# Allegro board Receiver.brd
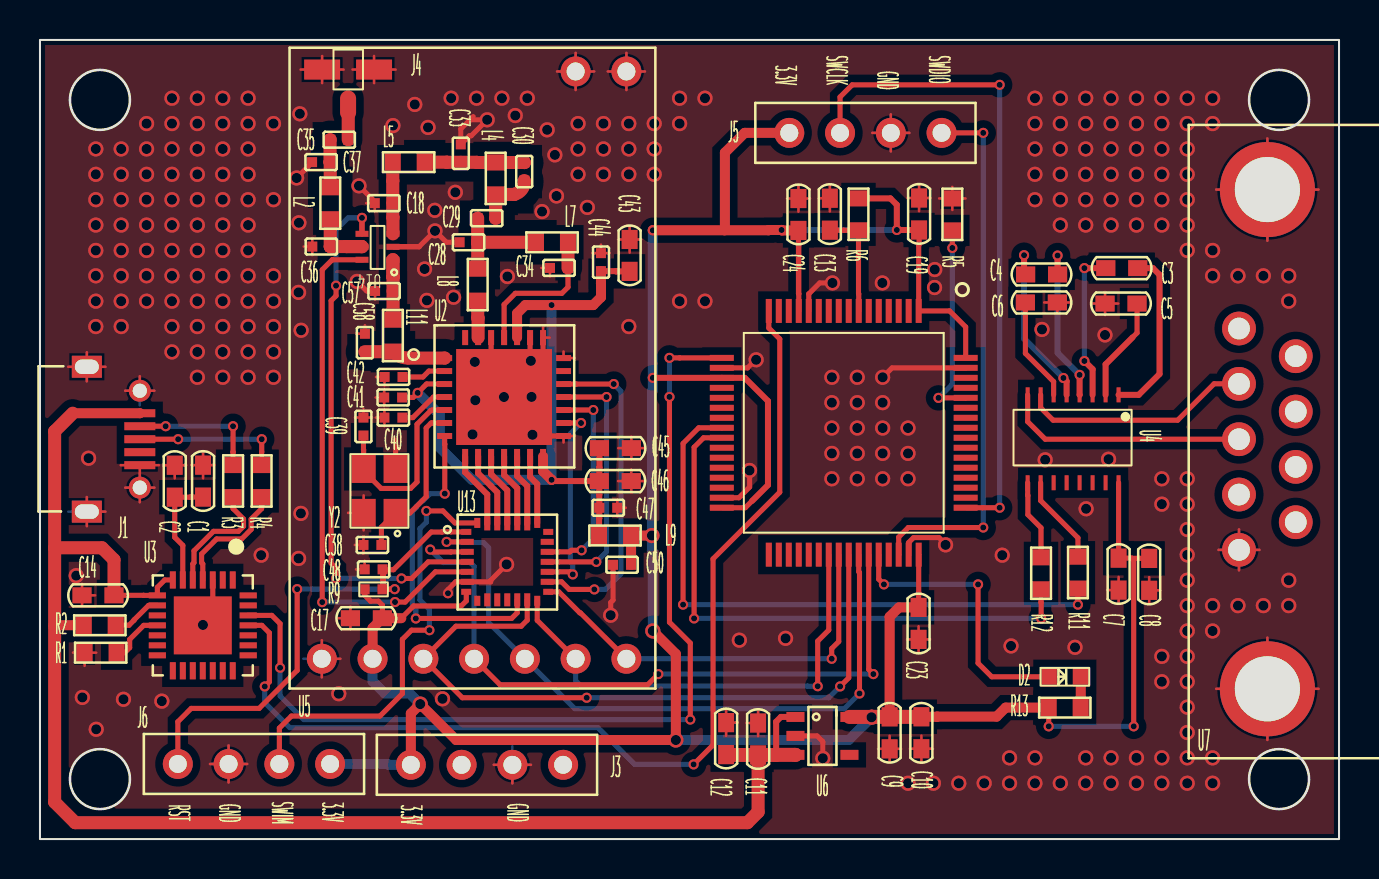
[diagram p0: board, top side]
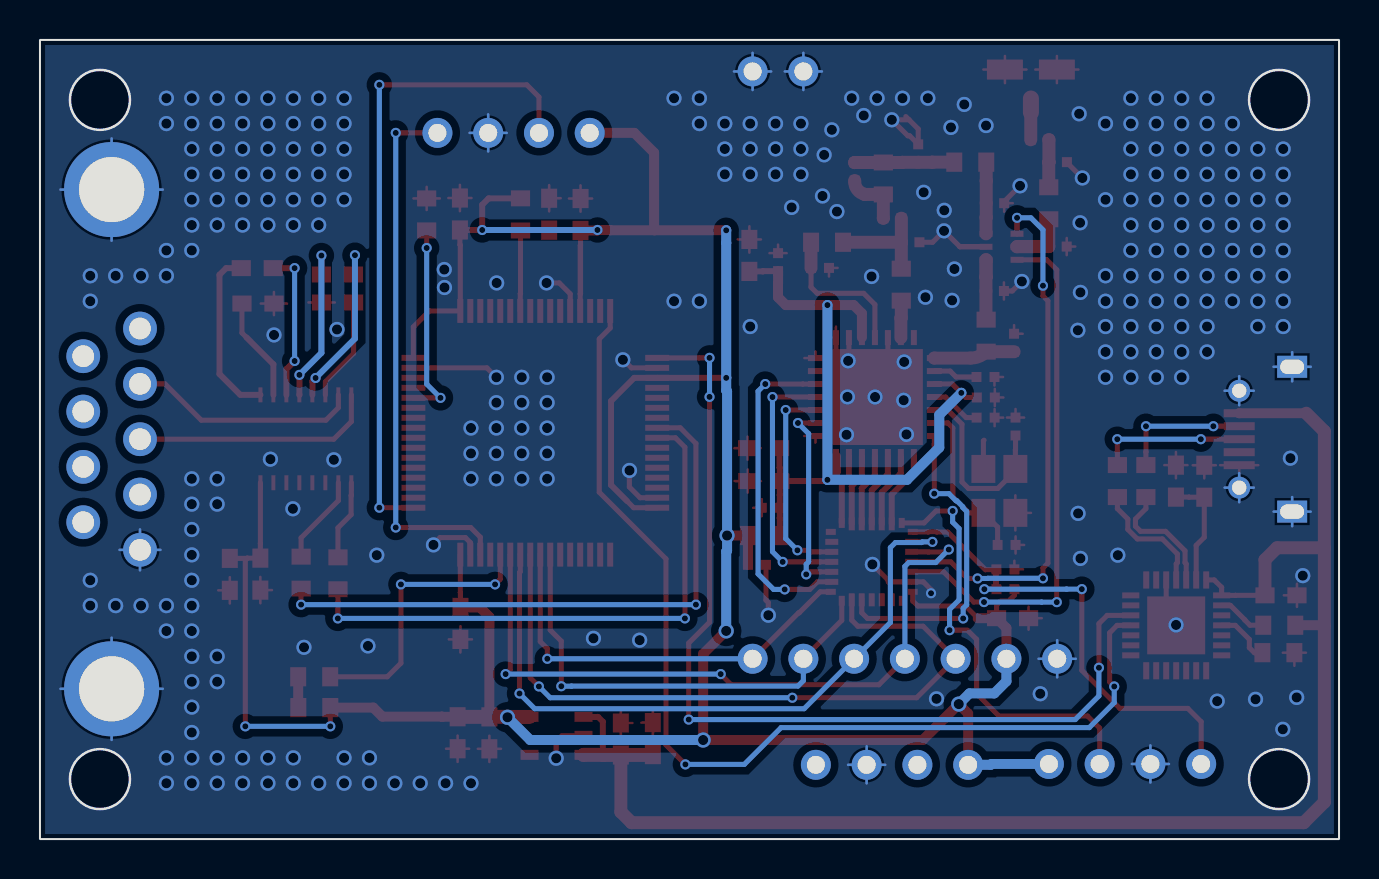
[diagram p1: board, bottom side, seen from below]

Outline 65 x 40 mm; copper layers: TOP, BOTTOM. Coordinates in mm from the lower left corner of the outline.
Outline path: rectangle 0,0 65,40 ; circle c3,37 r1.5 ; circle c3,37 r1.5 ; circle c3,3 r1.5 ; circle c3,3 r1.5 ; circle c62,37 r1.5 ; circle c62,37 r1.5 ; circle c62,3 r1.5 ; circle c62,3 r1.5

## Design rules (mm)
net group D: nets D+ D-
net group RF: nets N78654 N78752 N78904 N78924 N78952

## Placement (name value [footprint] x y rotation side)
C1  4.7uF/10V  [C0603]  8.16 18.72 270 top
C2  0.1uF/10V  [C0603]  6.74 18.71 270 top
C3  0.1uF/10V  [C0603]  53.33 28.58 0 top
C4  0.1uF/10V  [C0603]  49.32 28.26 0 top
C5  0.1uF/10V  [C0603]  53.29 26.81 0 top
C6  0.1uF/10V  [C0603]  50.91 26.86 180 top
C7  10uF/10V  [C0603]  53.97 14.06 270 top
C8  0.1uF/10V  [C0603]  55.5 12.45 90 top
C9  10uF/10V  [C0603]  42.51 6.12 270 top
C10  0.1uF/10V  [C0603]  44.1 4.52 90 top
C11  10uF/10V  [C0603]  35.93 4.21 90 top
C12  0.1uF/10V  [C0603]  34.33 5.83 270 top
C13  0.1uF/10V  [C0603]  39.52 32.08 270 top
C14  10uF/10V  [C0603]  3.7 12.2 180 top
C17  0.1uF/10V  [C0603]  15.53 11.05 0 top
C18  12p  [C0402]  16.75 31.83 0 top
C19  0.1uF/10V  [C0603]  43.99 32.09 270 top
C23  0.1uF/10V  [C0603]  43.96 9.99 90 top
C24  0.1uF/10V  [C0603]  37.95 32.06 270 top
C28  18P  [C0402]  21.9 29.87 180 top
C29  22p  [C0402]  21.9 31.08 0 top
C30  9p  [C0402]  24.23 32.96 90 top
C33  18P  [C0402]  21.06 34.78 270 top
C34  8.2P  [C0402]  25.52 28.59 0 top
C35  16pF  [C0402]  14.52 35 0 top
C36  51pF  [C0402]  13.63 29.66 0 top
C37  12pF  [C0402]  13.61 33.88 0 top
C38  15P  [C0402]  17.08 14.72 180 top
C39  15P  [C0402]  16.19 20.2 90 top
C40  0.1uF  [C0402]  18.13 21.1 180 top
C41  0.1uF  [C0402]  17.22 22.1 0 top
C42  0.1uF  [C0402]  17.24 23.13 0 top
C43  10uF  [C0603]  29.5 30.01 270 top
C44  0.1uF  [C0402]  28.07 29.33 270 top
C45  10uF  [C0603]  29.59 19.57 180 top
C46  10uF  [C0603]  29.58 17.92 180 top
C47  0.1uF  [C0402]  28.88 16.58 180 top
C48  47P  [C0402]  16.25 13.5 0 top
C50  0.1uF  [C0402]  28.68 13.73 0 top
C57  8.2P  [C0402]  17.67 27.43 180 top
C58  8.2P  [C0402]  16.26 24.39 90 top
D2  F5F1  [LED0603]  50.48 8.12 0 top
J1  CON9  [MICROUSB]  4.99 18.72 90 top
J3  -  [CON4]  14.52 3.76 180 top
J4  -  [IPX]  15.42 36.72 0 top
J5  -  [CON4]  37.49 35.35 0 top
J6  -  [CON4]  18.56 3.72 0 top
L2  15nH  [R0603]  14.52 31.03 90 top
L4  12nH  [R0603]  22.8 32.27 90 top
L5  15nH  [R0603]  19.25 33.88 180 top
L7  47nH  [R0603]  24.82 29.87 0 top
L8  33nH  [R0603]  21.9 26.95 90 top
L9  33nH  [R0603]  29.58 15.19 180 top
L11  18nH  [R0603]  17.66 24.4 90 top
R1  10K  [R0603]  2.23 9.33 0 top
R2  10K  [R0603]  2.19 10.7 0 top
R3  49.9  [R0603]  9.66 17.12 90 top
R4  49.9  [R0603]  11.09 17.12 90 top
R5  100K  [R0603]  45.65 30.47 90 top
R6  10K  [R0603]  40.96 30.47 90 top
R9  10K  [R0402]  17.14 12.5 180 top
R11  0  [R0603]  51.93 12.54 90 top
R12  0  [R0603]  50.09 12.5 90 top
R13  1K  [R0603]  50.47 6.58 0 top
U2  SX1278  [QFN28_LEAD]  18.61 23.84 0 top
U3  -  [CP2102]  8.15 10.7 270 top
U4  sipex3232ee  [SIPEX3232EE]  53.97 22.24 270 top
U5  -  [APC340]  14.1 9.02 180 top
U6  XC6234H331VR-G/TPS780330200DDCT  [SOT-23-5]  37.8 6.11 270 top
U7  -  [DB9]  60 25.56 90 top
U10  STM32L431rct6  [LQFP-64]  40.22 20.34 270 top
U13  STM8L151G6U6  [QFN28_NOLEAD_0_5]  23.38 13.88 0 top
U14  PE4259  [SC-70]  17.66 29 180 top
Y2  FTR5092-A2-32MHZ  [CRY_3225]  16.19 16.33 90 top

## Library data of the parts
C1-C6 C8 C10 C12 C13 C17-C19 C23 C24 C28-C30 C33-C48 C50 C57 C58 = CAP NP
C7 C9 C11 C14 = CAP POL
D2 = F5F1
J1 = CON9
J3 J5 J6 = CON4
J4 = IPX
L2 L4 L5 L7-L9 L11 = INDUCTOR
R1-R6 R11 R12 = R
R9 R13 = RESISTOR
U2 = SX1278
U3 = CP2012_8
U4 = sipex3232ee
U5 = APC340_0
U6 = XC6234H331VR_2
U7 = DB9_1
U10 = STM32L431rct6_0
U13 = STM8L151G6U6
U14 = PE4259
Y2 = CRY_0

## Footprints (pads in the part's own frame, mm; a bottom-side part is the same pattern mirrored in y, then rotated)
APC340
  round 1.5 hole 0.9: 1(0,0) 2(-2.54,0) 3(-5.08,0) 4(-7.62,0) 5(-10.16,0) 6(-12.7,0) 7(-15.24,0) 8(-15.24,-29.4) 9(-12.7,-29.4)
C0402
  rect 0.5x0.5 smd: 1(0,0) 2(0.9,0)
C0603
  rect 0.96x0.8 smd: 1(0,0) 2(1.6,0)
CON4
  round 1.5 hole 0.9: 1(0,0) 2(2.54,0) 3(5.08,0) 4(7.62,0)
CP2102
  rect 0.86x0.3 smd: 1(-2.273,1.5) 2(-2.273,1) 3(-2.273,0.5) 4(-2.273,0) 5(-2.273,-0.5) 6(-2.273,-1) 7(-2.273,-1.5) 15(2.273,-1.5) 16(2.273,-1) 17(2.273,-0.5) 18(2.273,0) 19(2.273,0.5) 20(2.273,1) 21(2.273,1.5)
  rect 0.3x0.86 smd: 8(-1.5,-2.273) 9(-1,-2.273) 10(-0.5,-2.273) 11(0,-2.273) 12(0.5,-2.273) 13(1,-2.273) 14(1.5,-2.273) 22(1.5,2.273) 23(1,2.273) 24(0.5,2.273) 25(0,2.273) 26(-0.5,2.273) 27(-1,2.273) 28(-1.5,2.273)
  rect 2.9x2.9 smd: 29(0,0)
CRY_3225
  rect 1.4x1.2 smd: 1(0,-1.6) 2(2.2,-1.6) 3(2.2,0) 4(0,0)
DB9
  round 1.69 hole 1.09: 1(0,0) 2(-2.77,0) 3(-5.54,0) 4(-8.31,0) 5(-11.08,0) 6(-1.385,-2.84) 7(-4.155,-2.84) 8(-6.925,-2.84) 9(-9.695,-2.84)
  round 4.76 hole 3.26: 10(6.955,-1.42) 11(-18.035,-1.42)
IPX
  oval 0.8x1.5 smd: 1(0,0)
  rect 1.8x1 smd: 2(1.3,1.8) 3(-1.3,1.8)
LED0603
  rect 0.8x0.96 smd: 1(0,0) 2(1.6,0)
LQFP-64
  rect 1.2x0.3 smd: 1(-6.1,3.75) 2(-6.1,3.25) 3(-6.1,2.75) 4(-6.1,2.25) 5(-6.1,1.75) 6(-6.1,1.25) 7(-6.1,0.75) 8(-6.1,0.25) 9(-6.1,-0.25) 10(-6.1,-0.75) 11(-6.1,-1.25) 12(-6.1,-1.75) 13(-6.1,-2.25) 14(-6.1,-2.75) 15(-6.1,-3.25) 16(-6.1,-3.75) 33(6.1,-3.75) 34(6.1,-3.25) 35(6.1,-2.75) 36(6.1,-2.25) 37(6.1,-1.75) 38(6.1,-1.25) 39(6.1,-0.75) 40(6.1,-0.25) 41(6.1,0.25) 42(6.1,0.75) 43(6.1,1.25) 44(6.1,1.75) 45(6.1,2.25) 46(6.1,2.75) 47(6.1,3.25) 48(6.1,3.75)
  rect 0.3x1.2 smd: 17(-3.75,-6.1) 18(-3.25,-6.1) 19(-2.75,-6.1) 20(-2.25,-6.1) 21(-1.75,-6.1) 22(-1.25,-6.1) 23(-0.75,-6.1) 24(-0.25,-6.1) 25(0.25,-6.1) 26(0.75,-6.1) 27(1.25,-6.1) 28(1.75,-6.1) 29(2.25,-6.1) 30(2.75,-6.1) 31(3.25,-6.1) 32(3.75,-6.1) 49(3.75,6.1) 50(3.25,6.1) 51(2.75,6.1) 52(2.25,6.1) 53(1.75,6.1) 54(1.25,6.1) 55(0.75,6.1) 56(0.25,6.1) 57(-0.25,6.1) 58(-0.75,6.1) 59(-1.25,6.1) 60(-1.75,6.1) 61(-2.25,6.1) 62(-2.75,6.1) 63(-3.25,6.1) 64(-3.75,6.1)
MICROUSB
  rect 0.4x1.55 smd: 1(2.6,0) 2(1.95,0) 3(1.3,0) 4(0.65,0) 5(0,0)
  round 1.1 hole 0.71: 6(-1.125,0) 7(3.725,0)
  rect 1.1x1.5 hole 0.72x1.2: 8(-2.325,2.65) 9(4.925,2.65)
QFN28_LEAD
  rect 0.75x0.3 smd: 1(1.633,0.237) 2(1.633,-0.413) 3(1.633,-1.063) 4(1.633,-1.713) 5(1.633,-2.363) 6(1.633,-3.013) 7(1.633,-3.663) 15(7.583,-3.663) 16(7.583,-3.013) 17(7.583,-2.363) 18(7.583,-1.713) 19(7.583,-1.063) 20(7.583,-0.413) 21(7.583,0.237)
  rect 0.3x0.75 smd: 8(2.658,-4.688) 9(3.308,-4.688) 10(3.958,-4.688) 11(4.608,-4.688) 12(5.258,-4.688) 13(5.908,-4.688) 14(6.558,-4.688) 22(6.558,1.262) 23(5.908,1.262) 24(5.258,1.262) 25(4.608,1.262) 26(3.958,1.262) 27(3.308,1.262) 28(2.658,1.262)
  rect 4.8x4.8 smd: 29(4.608,-1.713)
QFN28_NOLEAD_0_5
  rect 0.5x0.3 smd: 1(-2.05,1.5) 7(-2.05,-1.5) 15(2.05,-1.5) 21(2.05,1.5)
  rect 0.65x0.3 smd: 2(-2,1) 3(-2,0.5) 4(-2,0) 5(-2,-0.5) 6(-2,-1) 16(2,-1) 17(2,-0.5) 18(2,0) 19(2,0.5) 20(2,1)
  rect 0.3x0.5 smd: 8(-1.5,-1.95) 14(1.5,-1.95) 22(1.5,1.95) 28(-1.5,1.95)
  rect 0.3x0.65 smd: 9(-1,-1.9) 10(-0.5,-1.9) 11(0,-1.9) 12(0.5,-1.9) 13(1,-1.9) 23(1,1.9) 24(0.5,1.9) 25(0,1.9) 26(-0.5,1.9) 27(-1,1.9)
R0402
  rect 0.5x0.5 smd: 1(0,0) 2(0.9,0)
R0603
  rect 0.8x0.96 smd: 1(0,0) 2(1.6,0)
SC-70
  rect 0.65x0.3 smd: 1(0,0) 2(0,-0.65) 3(0,-1.3) 4(1.55,-1.3) 5(1.55,-0.65) 6(1.55,0)
SIPEX3232EE
  rect 0.75x0.2 smd: 1(0,0) 2(0,-0.65) 3(0,-1.3) 4(0,-1.95) 5(0,-2.6) 6(0,-3.25) 7(0,-3.9) 8(0,-4.55) 9(4.4,-4.55) 10(4.4,-3.9) 11(4.4,-3.25) 12(4.4,-2.6) 13(4.4,-1.95) 14(4.4,-1.3) 15(4.4,-0.65) 16(4.4,0)
SOT-23-5
  rect 0.5x0.9 smd: 1(0,0) 2(0.95,0) 3(1.9,0) 4(1.9,2.7) 5(0,2.7)

## Nets
GND: C1.1 C2.1 C5.1 C6.1 C7.2 C8.1 C9.2 C10.1 C11.2 C12.1 C13.1 C14.2 C17.1 C18.1 C19.1 C23.1 C24.1 C28.2 C33.1 C34.1 C36.1 C37.1 C38.2 C39.2 C40.2 C41.1 C42.1 C43.1 C44.1 C45.1 C46.1 C47.1 C48.1 C50.1 C57.2 C58.2 J1.5 J1.6 J1.7 J1.8 J1.9 J3.3 J4.2(G#2) J4.3(G#3) J5.3 J6.3 R1.1 R5.2 U2.15(GND#15) U2.21(RFI_HF (GND)) U2.22(RFO_HF (GND)) U2.23(GND#23) U2.26(GND#26) U2.29(GROUND) U3.3(GND#3) U3.29(GND#29) U5.1(GND#1) U5.8(GND#8) U5.9(GND#9) U6.2(VSSS) U7.5(GND) U7.10 U7.11 U10.12(VSSA/VREF) U10.18(VSS#18) U10.31(VSS#31) U10.47(VSS#47) U10.63(VSS#63) U13.6(VSS1) U14.2(GND) Y2.2(G#2) Y2.4(G#4)
VCC: C11.1 C12.2 C14.1 J1.1 R2.1 U3.7(REGIN) U3.8(VBUS) U6.1(VIN) U6.3(CE)
VCC_3.3V: C7.1 C8.2 C9.1 C10.2 C17.2 C19.2 C23.2 C24.2 C50.2 J3.1 J5.1 J6.1 L9.1 R6.2 R9.2 R13.1 U4.16(VCC) U5.2(VCC) U6.5(VOUT) U10.1(VBAT) U10.13(VDDA/VREF+) U10.19(VDD#19) U10.32(VDD#32) U10.48(VDD#48) U10.64(VDD#64) U13.7(VDD1)
VCC_RF: C41.2 C43.2 C44.2 C45.2 C46.2 C47.2 L9.2 U2.3(VBAT_ANA) U2.14(VBAT_DIG) U2.24(VBAT_RF)
COM_RX: R12.1 U10.25(PC5)
COM_TX: R11.1 U10.24(PC4)
D+: R4.1 U3.4(D+)
D-: R3.1 U3.5(D-)
DIO0: U2.8(DIO0) U13.27(PC6)
DIO1: U2.9(DIO1/DCLK) U13.26(PC5)
DIO2: U2.10(DIO2/DATA) U13.25(PC4)
DIO3: U2.11(DIO3) U13.24(PC3)
DIO4: U2.12(DIO4) U13.23(PC2)
DIO5: U2.13(DIO5) U13.22(PC1)
LORA_A: U5.3(SET_A) U10.41(PA8) U13.13(PB1)
LORA_AUX: U5.6(AUX) U10.39(PC8) U13.14(PB2)
LORA_B: U5.7(SET_B) U10.40(PC9) U13.15(PB3)
LORA_RST: U2.7(NRESET) U13.12(PB0)
LORA_RXD: U5.4(RXD) U10.43(PA10) U13.3(PA3/UART1_RXD)
LORA_TXD: U5.5(TXD) U10.42(PA9) U13.2(PA2/UART1_TXD)
RS232_RX: U4.8(R2IN) U7.3(RXD)
RS232_TX: U4.7(T2OUT) U7.2(TXD)
RST: C48.2 J3.4 R9.1 U13.1(NRST)
RXD: U3.26(TXD) U10.17(PA3)
RXEN: U13.4(PA4) U14.4(CTRL)
SCLK: J5.2 U10.49(PA14)
SPI_MISO: U2.17(MISO) U13.19(PB7/SPI_MISO)
SPI_MOSI: U2.18(MOSI) U13.18(PB6/SPI_MOSI)
SPI_NSS: U2.19(NSS) U13.16(PB4/SPI_NSS)
SPI_SCK: U2.16(SCK) U13.17(PB5/SPI_SCK)
SWDIO: J5.4 U10.46(PA13)
SWIM: J3.2 U13.28(PA0)
TXD: U3.25(RXD) U10.16(PA2)
TXEN: U13.5(PA5) U14.6(VDD)
N58413: C1.2 C2.2 U3.6(VDD)
N58587: R1.2 U3.11(\S\U\S\P\E\N\D\)
N58599: R2.2 U3.9(RST)
N58623: J1.2 R3.2
N58627: J1.3 R4.2
N59257: D2.2(ANODE) R13.2
N59265: D2.1(CATHODE) U10.44(PA11)
N59291: C13.2 R6.1 U10.7(NRST)
N59847: R5.1 U10.60(PH3/BOOT0)
N76001: C3.2 U4.1(C1+)
N76005: C3.1 U4.3(C1-)
N76017: C4.2 U4.4(C2+)
N76021: C4.1 U4.5(C2-)
N76033: C5.2 U4.2(V1+)
N76041: C6.2 U4.6(V-)
N76125: R11.2 U4.10(T2IN)
N78646: C36.2 L2.1 U14.5(RFC)
N78654: C35.1 C37.2 L2.2
N78658: C35.2 J4.1(ANT)
N78752: C58.1 L11.1 U2.1(RFI_LF)
N78904: C29.2 C30.1 L4.1
N78924: C30.2 C33.2 L4.2 L5.1
N78940: C18.2 L5.2 U14.3(RF2)
N78952: C28.1 C29.1 L7.1 L8.2
N79012: C34.2 L7.2 U2.25(VR_PA)
N79016: L8.1 U2.27(PA_BOOST)
N79184: C38.1 U2.6(XTB) Y2.1(IN)
N79188: C39.1 U2.5(XTA) Y2.3(OUT)
N79232: C40.1 U2.4(VR_DIG)
N79316: C42.2 U2.2(VR_ANA)
N79364: C57.1 L11.2 U14.1(RF1)
N758171: R12.2 U4.9(R2OUT)

Pads without a net: J1 4; J6 2 4; U2 20 28; U3 1 2 10 12 13 14 15 16 17 18 19 20 21 22 23 24 27 28; U4 11 12 13 14 15; U6 4; U7 1 4 6 7 8 9; U10 2 3 4 5 6 8 9 10 11 14 15 20 21 22 23 26 27 28 29 30 33 34 35 36 37 38 45 50 51 52 53 54 55 56 57 58 59 61 62; U13 8 9 10 11 20 21

## Via types
v1: diameter 0.508, hole 0.305, TOP to BOTTOM, 67 vias
v2: diameter 0.762, hole 0.508, TOP to BOTTOM, 278 vias

## Routing (per net, layer and track width the routed paths; a pad name or vN(x,y) marks a point on that pad's centre or on a via; arc(x,y) is an arc through that point)
GND: length 238.3
  TOP w0.127: 15.82,13.5 C48.1 16.25,13.93 ; 9.44,2.83 J3.3 ; J3.3 10.37,3.76 ; J3.3 8.51,3.76 ; J3.3 9.44,4.69 ; C8.1 56.08,12.45 ; C8.1 55.5,13.11 ; C8.1 55.5,11.79 ; U7.10 61.42,35.07 ; U7.10 58.86,32.51 ; U7.10 63.97,32.51 ; U7.10 61.42,29.95 ; 28.93,17.92 C46.1 ; C46.1 29.58,18.5 ; C46.1 30.24,17.92 ; C46.1 29.58,17.34 ; 27.64,29.33 C44.1 ; C44.1 28.07,29.76 ; C44.1 28.5,29.33 ; C1.1 8.16,19.37 ; C1.1 7.58,18.72 ; C1.1 8.16,18.06 ; C1.1 8.74,18.72 ; C9.2 42.51,5.17 ; C9.2 41.94,4.52 ; C9.2 43.09,4.52 ; C9.2 42.51,3.86 ; U5.8 29.34,39.35 ; U5.8 29.34,37.5 ; U5.8 28.42,38.42 ; U5.8 30.27,38.42 ; C45.1 30.25,19.57 ; C45.1 29.59,18.99 ; C45.1 28.94,19.57 ; C45.1 29.59,20.15 ; 6.74,18.05 C2.1 ; C2.1 6.17,18.71 ; C2.1 7.32,18.71 ; 2.1,11.62 C14.2 ; C14.2 2.76,12.2 ; C14.2 2.1,12.78 ; C36.1 13.63,30.09 ; C36.1 13.2,29.66 ; C36.1 13.63,29.23 ; J1.8 3.27,16.39 ; J1.8 2.34,17.12 ; J1.8 2.34,15.66 ; C43.1 30.08,30.01 ; C43.1 29.5,29.36 ; C43.1 28.93,30.01 ; C43.1 29.5,30.67 ; J1.7 4.99,23.17 ; J1.7 5.72,22.44 ; J1.7 4.27,22.44 ; 2.34,22.91 J1.9 ; J1.9 2.34,24.37 ; J1.9 3.27,23.64 ; J1.9 1.42,23.64 ; C17.1 15.53,11.63 ; C17.1 15.53,10.48 ; C17.1 14.88,11.05 ; 61.42,4.96 U7.11 ; U7.11 63.97,7.52 ; U7.11 58.86,7.52 ; U7.11 61.42,10.08 ; 16.26,25.72 C58.2 15.83,25.29 ; C11.2 35.93,6.47 ; C11.2 35.36,5.81 ; C11.2 35.93,5.15 ; 15.76,21.1 C39.2 ; C39.2 16.19,21.53 ; C39.2 16.61,21.1 ; C10.1 44.1,5.18 ; C10.1 44.1,3.86 ; C10.1 44.68,4.52 ; C10.1 43.53,4.52 ; J4.2 16.72,39.2 ; J4.2 17.79,38.52 ; J4.2 15.64,38.52 ; J4.2 16.72,37.84 ; R5.2 46.31,32.07 ; R5.2 45.65,31.49 ; R5.2 44.99,32.07 ; R5.2 45.65,32.64 ; 16.77,27.86 C57.2 16.77,27.01 ; 37.37,32.06 C24.1 ; C24.1 37.95,31.41 ; C24.1 38.53,32.06 ; C24.1 37.95,32.72 ; J4.3 15.19,38.52 ; J4.3 14.12,37.84 ; J4.3 13.04,38.52 ; J4.3 14.12,39.2 ; 26.8,37.5 U5.9 ; U5.9 26.8,39.35 ; U5.9 27.73,38.42 ; U5.9 25.88,38.42 ; J1.6 5.72,17.59 ; J1.6 4.99,16.86 ; J1.6 4.27,17.59 ; J1.6 4.99,18.32 ; 16.19,15.45 Y2.4 ; Y2.4 15.42,16.33 ; Y2.4 16.19,17.2 ; 16.33,31.83 C18.1 16.75,31.4 ; 43.39,9.99 C23.1 ; C23.1 43.96,10.65 ; C23.1 44.54,9.99 ; C23.1 43.96,9.34 ; U5.1 15.03,9.02 ; U5.1 14.1,8.1 ; U5.1 14.1,9.95 ; 22.71,3.72 J6.3 ; J6.3 24.56,3.72 ; J6.3 23.64,2.79 ; C7.2 53.97,13.12 ; C7.2 53.97,11.8 ; C7.2 53.39,12.46 ; C47.1 28.88,17.01 ; C47.1 29.31,16.58 ; C47.1 28.88,16.16 ; 25.5,25.1 U2.22 25.17,25.65 ; 26.75,24.08 U2.21 26.2,24.4 ; J5.3 43.5,35.35 ; J5.3 42.57,36.28 ; J5.3 41.65,35.35 ; J5.3 42.57,34.42 ; 4.99,18.34 J1.5 ; J1.5 4.04,18.72 ; J1.5 5.95,18.72 ; 17.23,20.67 C40.2 ; C40.2 16.81,21.1 ; C40.2 17.23,21.52 ; 17.24,22.7 C42.1 16.81,23.13 ; 17.22,21.68 C41.1 ; C41.1 17.22,22.53 ; C41.1 16.8,22.1 ; C12.1 34.91,5.83 ; C12.1 34.33,5.17 ; C12.1 34.33,6.49 ; C5.1 53.29,27.38 ; C5.1 53.29,26.23 ; C5.1 52.64,26.81 ; C5.1 53.95,26.81 ; 26.75,20.18 U2.15 26.2,19.85 ; 43.99,31.43 C19.1 ; C19.1 44.57,32.09 ; C19.1 43.99,32.75 ; C19.1 43.41,32.09 ; U7.5 60,15.5 ; U7.5 60,13.45 ; U7.5 58.97,14.48 ; U7.5 61.02,14.48 ; 15.76,14.72 C38.2 ; C38.2 16.18,14.29 ; C38.2 16.18,15.15 ; 38.95,32.08 C13.1 ; C13.1 39.52,31.42 ; C13.1 39.52,32.73 ; 25.52,28.16 C34.1 25.09,28.59 ; C6.1 51.56,26.86 ; C6.1 50.25,26.86 ; C6.1 50.91,26.28 ; R1.1 2.81,9.33 ; R1.1 2.23,8.67 ; R1.1 1.66,9.33
  TOP w0.254: v2(23.35,13.75) 22.55,12.95 22.55,12.88 U13.6 20.8,12.88 20.42,12.49 v1(20.42,12.3) ; 35.51,18.48 35.51,17.62 34.97,17.09 U10.31 ; U14.2 18.97,29.65 18.98,29.66 ; v2(39.17,4.04) 39.17,4.88 38.89,5.16 U6.2 ; v2(24.64,20.24) 25.28,20.24 25.34,20.18 U2.15 ; v2(24.56,23.94) 24.52,23.98 U2.23 ; v2(42.16,23.11) 42.64,23.59 U10.63 ; C28.2 20.34,29.87 v2(19.76,30.44) 18.98,29.66 ; C50.1 28.68,11.96 28.56,11.84 v2(28.56,11.2) ; U10.12 38.47,27.29 39.02,27.84 v2(39.65,27.84) ; U2.29 25.17,24.08 U2.22 ; 18.98,29.66 17.66,29.66 ; U10.18 35.4,23.59 35.82,24 ; U3.29 8.65,11.2 U3.3 ; 21.51,36 21.68,36.16 ; 21.51,36 v2(22.38,36) 21.58,35.2 21.49,35.2 C33.1 21.06,35.55 21.51,36 ; C37.1 13.61,33.86 v2(12.84,33.09) ; 17.76,19.96 17.79,19.93 Y2.2 ; 45.29,14.78 44.98,15.09 43.71,15.09 43.47,14.84 U10.47 ; v2(15.87,27.91) 16.35,27.43 C57.2 ; v2(23.22,22.13) 22.57,22.77 U2.26 ; C18.1 16.75,31.91 v2(15.96,32.7)
  BOTTOM w0.127: 1.42,16.39 J1.8 ; J1.8 3.27,16.39 ; J1.8 2.34,15.66 ; J1.8 2.34,17.12 ; 4.27,22.44 J1.7 ; J1.7 4.99,23.17 ; J1.7 4.99,21.71 ; J1.7 5.72,22.44 ; 60,13.45 U7.5 ; U7.5 61.02,14.48 ; U7.5 58.97,14.48 ; U7.5 60,15.5 ; 22.71,3.72 J6.3 ; J6.3 23.64,4.64 ; J6.3 24.56,3.72 ; J6.3 23.64,2.79 ; 13.18,9.02 U5.1 ; U5.1 14.1,9.95 ; U5.1 14.1,8.1 ; U5.1 15.03,9.02 ; U5.9 27.73,38.42 ; U5.9 26.8,37.5 ; U5.9 25.88,38.42 ; U5.9 26.8,39.35 ; U5.8 29.34,39.35 ; U5.8 30.27,38.42 ; U5.8 29.34,37.5 ; U5.8 28.42,38.42 ; J1.6 5.72,17.59 ; J1.6 4.99,16.86 ; J1.6 4.99,18.32 ; J1.6 4.27,17.59 ; J3.3 9.44,4.69 ; J3.3 10.37,3.76 ; J3.3 8.51,3.76 ; J3.3 9.44,2.83 ; 1.42,23.64 J1.9 ; J1.9 2.34,24.37 ; J1.9 2.34,22.91 ; J1.9 3.27,23.64 ; 61.42,4.96 U7.11 ; U7.11 61.42,10.08 ; U7.11 63.97,7.52 ; U7.11 58.86,7.52 ; J5.3 43.5,35.35 ; J5.3 42.57,34.42 ; J5.3 41.65,35.35 ; J5.3 42.57,36.28 ; U7.10 63.97,32.51 ; U7.10 61.42,35.07 ; U7.10 61.42,29.95 ; U7.10 58.86,32.51
  vias: v2(1.81,13.19) v2(2.12,7.09) v2(2.43,19.06) v2(2.79,34.54) v2(2.79,33.27) v2(2.79,32) v2(2.79,30.73) v2(2.79,29.46) v2(2.79,28.19) v2(2.79,26.92) v2(2.79,25.65) v2(2.81,5.49) v2(4.06,34.54) v2(4.06,33.27) v2(4.06,32) v2(4.06,30.73) v2(4.06,29.46) v2(4.06,28.19) v2(4.06,26.92) v2(4.06,25.65) v2(4.18,7) v2(5.33,35.81) v2(5.33,34.54) v2(5.33,33.27) v2(5.33,32) v2(5.33,30.73) v2(5.33,29.46) v2(5.33,28.19) v2(5.33,26.92) v2(6.1,6.9) v2(6.6,37.08) v2(6.6,35.81) v2(6.6,34.54) v2(6.6,33.27) v2(6.6,32) v2(6.6,30.73) v2(6.6,29.46) v2(6.6,28.19) v2(6.6,26.92) v2(6.6,25.65) v2(6.6,24.38) v2(7.87,37.08) v2(7.87,35.81) v2(7.87,34.54) v2(7.87,33.27) v2(7.87,32) v2(7.87,30.73) v2(7.87,29.46) v2(7.87,28.19) v2(7.87,26.92) v2(7.87,25.65) v2(7.87,24.38) v2(7.87,23.11) v2(8.15,10.72) v2(9.14,37.08) v2(9.14,35.81) v2(9.14,34.54) v2(9.14,33.27) v2(9.14,32) v2(9.14,30.73) v2(9.14,29.46) v2(9.14,28.19) v2(9.14,26.92) v2(9.14,25.65) v2(9.14,24.38) v2(9.14,23.11) v2(10.41,37.08) v2(10.41,35.81) v2(10.41,34.54) v2(10.41,33.27) v2(10.41,32) v2(10.41,30.73) v2(10.41,29.46) v2(10.41,28.19) v2(10.41,26.92) v2(10.41,25.65) v2(10.41,24.38) v2(10.41,23.11) v2(11.07,14.21) v2(11.68,35.81) v2(11.68,32) v2(11.68,28.19) v2(11.68,26.92) v2(11.68,25.65) v2(11.68,24.38) v2(11.68,23.11) v2(12.94,27.36) v2(12.94,14.05) v2(13,36.3) v2(12.96,30.85) v2(13.07,25.47) v2(13.06,16.3) v2(14.95,7.27) v2(17.66,35.71) v2(18.75,36.77) v2(19.24,28.54) v2(19.42,35.62) v2(19.36,26.96) v2(19.75,31.47) v2(20.14,7.02) v2(20.57,37.08) v2(20.7,27.12) v2(20.78,32.37) v2(21.64,20.25) v2(21.84,37.08) v2(21.76,23.88) v2(21.78,21.97) v2(23.11,37.08) v2(23.39,28.16) v2(23.78,36.22) v2(24.38,37.08) v2(24.6,22.13) v2(25.12,31.41) v2(25.38,35.5) v2(25.76,34.25) v2(25.85,32.19) v2(26.92,35.81) v2(26.92,34.54) v2(26.92,33.27) v2(27.39,31.62) v2(28.19,35.81) v2(28.19,34.54) v2(28.19,33.27) v2(29.46,35.81) v2(29.46,34.54) v2(29.46,33.27) v2(29.46,25.65) v2(30.73,35.81) v2(30.73,34.54) v2(30.73,33.27) v2(32,37.08) v2(32,35.81) v2(32,26.92) v2(33.27,37.08) v2(33.27,26.92) v2(34.99,9.96) v2(35.5,18.45) v2(35.83,23.99) v2(37.31,10.05) v2(39.62,23.11) v2(39.62,21.84) v2(39.62,20.57) v2(39.62,19.3) v2(39.62,18.03) v2(40.89,23.11) v2(40.89,21.84) v2(40.89,20.57) v2(40.89,19.3) v2(40.89,18.03) v2(42.15,27.84) v2(42.16,21.84) v2(42.16,20.57) v2(42.16,19.3) v2(42.16,18.03) v2(43.43,20.57) v2(43.43,19.3) v2(43.43,18.03) v2(43.43,2.79) v2(44.7,2.79) v2(44.77,28.51) v2(44.76,27.61) v2(45.31,14.72) v2(45.97,2.79) v2(47.24,2.79) v2(48.15,14.21) v2(48.51,4.06) v2(48.51,2.79) v2(48.59,9.67) v2(49.78,37.08) v2(49.78,35.81) v2(49.78,34.54) v2(49.78,33.27) v2(49.78,32) v2(49.78,4.06) v2(49.78,2.79) v2(50.14,25.51) v2(50.3,18.98) v2(51.05,37.08) v2(51.05,35.81) v2(51.05,34.54) v2(51.05,33.27) v2(51.05,32) v2(51.05,30.73) v2(51.05,2.79) v2(51.79,9.6) v2(52.32,37.08) v2(52.32,35.81) v2(52.32,34.54) v2(52.32,33.27) v2(52.32,32) v2(52.32,30.73) v2(52.34,16.53) v2(52.32,4.06) v2(52.32,2.79) v2(53.29,25.23) v2(53.47,19.01) v2(53.59,37.08) v2(53.59,35.81) v2(53.59,34.54) v2(53.59,33.27) v2(53.59,32) v2(53.59,30.73) v2(53.59,4.06) v2(53.59,2.79) v2(54.86,37.08) v2(54.86,35.81) v2(54.86,34.54) v2(54.86,33.27) v2(54.86,32) v2(54.86,30.73) v2(54.86,4.06) v2(54.86,2.79) v2(56.13,37.08) v2(56.13,35.81) v2(56.13,34.54) v2(56.13,33.27) v2(56.13,32) v2(56.13,30.73) v2(56.13,18.03) v2(56.13,16.76) v2(56.13,9.14) v2(56.13,7.87) v2(56.13,4.06) v2(56.13,2.79) v2(57.4,37.08) v2(57.4,35.81) v2(57.4,34.54) v2(57.4,33.27) v2(57.4,32) v2(57.4,30.73) v2(57.4,29.46) v2(57.4,18.03) v2(57.4,16.76) v2(57.4,15.49) v2(57.4,14.22) v2(57.4,12.95) v2(57.4,11.68) v2(57.4,10.41) v2(57.4,9.14) v2(57.4,7.87) v2(57.4,6.6) v2(57.4,5.33) v2(57.4,4.06) v2(57.4,2.79) v2(58.67,37.08) v2(58.67,35.81) v2(58.67,29.46) v2(58.67,28.19) v2(58.67,11.68) v2(58.67,10.41) v2(58.67,4.06) v2(58.67,2.79) v2(59.94,28.19) v2(59.94,11.68) v2(61.21,28.19) v2(61.21,11.68) v2(62.48,28.19) v2(62.48,26.92) v2(62.48,12.95) v2(62.48,11.68)
VCC: length 78.2
  TOP w0.254: R2.1 2.19,10.78 ; C14.1 5.19,12.2 5.19,12.2 U3.8 5.87,12.6 6.24,12.97 U3.7
  TOP w0.3: U6.1 37.08,6.11 36.84,5.87 36.84,4.23 36.81,4.21
  TOP w0.5: R2.1 0.76,10.7 0.73,10.67 ; J1.1 1.64,21.32
  TOP w0.65: 1.64,21.32 0.73,20.41 0.73,14.56 ; 0.73,14.56 0.75,14.58 3.1,14.58 3.7,13.98 C14.1 ; 0.73,14.56 0.73,1.85 1.76,0.82 35.4,0.82 35.93,1.36 C11.1
  TOP w0.7: U6.3 36.81,4.21 36.81,4.21 C11.1 34.35,4.21 C12.2
VCC_3.3V: length 164.4
  TOP w0.254: U10.64 46.32,25.63 45.52,26.44 U10.1 43.97,29.73 43.99,29.75 C19.2 ; R13.1 v1(50.47,5.64) ; U13.7 21.33,11.92 21.08,11.67 18.69,11.67 18.08,11.05 ; 35.63,16.93 35.29,16.59 U10.32 ; v1(54.73,5.64) 54.73,13.96 54.64,14.05 ; 37.95,29.73 C24.2 ; 37.95,29.73 37.97,29.71 37.97,27.29 ; 37.95,29.73 37.95,27.3 37.97,27.29 ; 37.97,27.29 U10.13 ; R9.2 16.24,12.21 16.54,11.91 16.93,11.91 17.13,11.71 C17.2 ; U10.48 43.97,14.23 43.97,12.33 43.96,12.33 C23.2 ; 54.64,14.05 54.63,14.06 C7.1 53.97,14.8 53.97,14.8 U4.16 ; 54.64,14.05 C8.2
  TOP w0.3: R6.2 42.55,32.07 42.87,31.75 v1(42.87,30.49) C19.2 ; v1(30.66,23.09) U10.19 35.27,23.09 36.43,21.92 36.43,17.72 35.63,16.93
  TOP w0.5: J6.1 18.56,6.29 v2(19.03,6.76) 20.83,4.96 v2(31.82,4.96) 31.82,9.26 v2(30.66,10.42) ; v2(30.62,15.19) L9.1 C50.2 ; 18.08,11.05 C17.2 16.64,10.56 U5.2 ; C23.2 42.98,11.59 42.51,11.13 C9.1 ; C10.2 44.88,6.12 44.89,6.13 47.87,6.13 48.32,6.58 R13.1 ; 34.26,30.47 v1(30.66,30.47) ; 34.26,30.47 34.27,30.48 34.27,34.36 35.26,35.35 J5.1 ; 34.26,30.47 36.46,30.47 36.47,30.49 v1(37.11,30.49) 37.13,30.46 C24.2 ; 41.59,6.11 v2(41.61,6.1)
  TOP w0.7: U6.5 41.63,6.11 41.64,6.12 C9.1 44.1,6.12 C10.2
  BOTTOM w0.254: v1(50.47,5.64) v1(54.73,5.64)
  BOTTOM w0.3: v1(42.87,30.49) v1(37.11,30.49)
  BOTTOM w0.5: v2(30.66,10.42) 30.66,14.39 30.62,14.43 v2(30.62,15.19) 30.62,22.41 30.66,22.45 v1(30.66,23.09) 30.66,29.84 30.66,29.84 v1(30.66,30.47) ; v2(41.61,6.1) 40.47,4.96 v2(31.82,4.96) ; J6.1 17.43,3.72 17.39,3.76 J3.1 ; U5.2 16.64,7.9 17.25,7.29 18.49,7.29 v2(19.03,6.76)
VCC_RF: length 37.9
  TOP w0.254: U2.3 20.25,22.78 20.24,22.78 19.35,22.78 v1(18.9,22.33) 18.67,22.1 C41.2
  TOP w0.3: C43.2 28.83,28.41 28.81,28.43 C44.2 ; C45.2 27.99,18.6 27.98,18.6 C46.2 ; C46.2 25.61,17.92 25.17,18.35 25.17,18.41 ; C46.2 27.98,17.24 27.98,17.24 C47.2 27.98,16.06 27.98,16.05 L9.2
  TOP w0.5: U2.14 25.17,18.41 v1(25.6,17.98) ; C44.2 28.07,27.8 28.07,27.8 28.07,27.12 27.68,26.73 v1(25.6,26.73) 24.29,26.73 23.87,26.32 U2.24
  BOTTOM w0.5: v1(25.6,26.73) v1(25.6,17.98) 21.62,17.98 20,19.6 20,21.23 v1(18.9,22.33)
COM_RX: length 29
  TOP w0.254: v1(32.73,11.04) 32.73,19.61 33.2,20.09 U10.25 ; v1(50.1,11.04) 50.1,11.84 50.09,11.85 R12.1
  BOTTOM w0.254: v1(32.73,11.04) v1(50.1,11.04)
COM_TX: length 30.9
  TOP w0.254: U10.24 34.12,20.58 32.96,20.58 32.18,19.8 v1(32.18,11.73) ; R11.1 51.93,12.54 v1(51.93,11.73)
  BOTTOM w0.254: v1(32.18,11.73) v1(51.93,11.73)
D+: length 6.2
  TOP w0.254: R4.1 11.09,16.54 10.57,16.02 10.57,15.5 10.09,15.02 8.84,15.02 8.09,14.27 8.09,13.83 8.15,13.77 U3.4
D-: length 6.2
  TOP w0.254: U3.5 7.65,13.77 7.71,13.83 7.71,14.43 8.68,15.4 9.93,15.4 10.19,15.66 10.19,16.02 9.66,16.54 R3.1
DIO0: length 3.8
  TOP w0.3: U13.27 22.38,17.25 21.27,18.36 U2.8
DIO1: length 3.8
  TOP w0.3: U13.26 22.88,17.35 22.57,17.67 21.92,18.31 U2.9
DIO2: length 3.7
  TOP w0.3: U2.10 22.57,18.27 23.38,17.46 U13.25
DIO3: length 3.6
  TOP w0.3: U13.24 23.88,17.56 23.22,18.22 U2.11
DIO4: length 3.6
  TOP w0.3: U13.23 24.38,17.67 23.87,18.17 U2.12
DIO5: length 3.5
  TOP w0.3: U2.13 24.52,18.13 24.88,17.77 U13.22
LORA_A: length 35.7
  TOP w0.254: v1(40.04,7.64) 40.47,8.07 40.47,14.23 U10.41 ; v1(27.36,7.07) 21.13,7.07 U5.3 20.81,10.65 24.08,10.65 24.38,10.96 U13.13
  BOTTOM w0.254: v1(27.36,7.07) 39.47,7.07 v1(40.04,7.64)
LORA_AUX: length 23.8
  TOP w0.254: U13.14 24.88,10.95 U5.6 ; v1(38.91,7.65) 38.91,9.91 39.47,10.46 U10.39
  BOTTOM w0.254: v1(38.91,7.65) 38.41,7.65 38.4,7.66 27.08,7.66 26.8,7.93 U5.6
LORA_B: length 20.9
  TOP w0.254: U13.15 25.96,12.38 27.02,11.32 27.05,11.32 U5.7 ; U10.40 39.97,9.89 39.62,9.53 v1(39.62,9.02)
  BOTTOM w0.254: U5.7 v1(39.62,9.02)
LORA_RST: length 16.2
  TOP w0.254: v1(20.26,17.29) 20.26,19.77 20.25,19.77 U2.7 ; v1(18.81,11.04) 23.59,11.04 23.88,11.33 U13.12
  BOTTOM w0.254: v1(18.81,11.04) 18.81,11.55 18.63,11.72 18.63,16.4 18.83,16.59 18.83,16.63 19.12,16.93 19.16,16.93 19.52,17.29 v1(20.26,17.29)
LORA_RXD: length 35.9
  TOP w0.254: v1(41.7,8.26) 41.47,8.49 41.47,14.23 U10.43 ; U5.4 23.02,7.73 30.41,7.73 v1(30.94,8.26) ; v1(19.53,14.49) 19.65,14.37 20.56,14.37 20.56,14.38 U13.3
  BOTTOM w0.254: U5.4 21.72,13.65 21.53,13.84 20.18,13.84 v1(19.53,14.49) ; v1(41.7,8.26) v1(30.94,8.26)
LORA_TXD: length 34.6
  TOP w0.254: U10.42 40.97,14.23 40.97,13.38 41.01,13.34 v1(41.01,7.29) ; v1(20.35,14.88) U13.2
  BOTTOM w0.254: v1(20.35,14.88) 20.85,14.88 20.89,14.84 22.19,14.84 22.45,14.59 22.45,10.84 U5.5 26.76,6.52 40.24,6.52 v1(41.01,7.29)
RS232_RX: length 12.3
  TOP w0.254: U4.8 49.42,20.89 50.3,20.01 U7.3
RS232_TX: length 11.6
  TOP w0.254: U7.2 59.99,22.79 58.75,22.79 56.93,20.97 50.69,20.97 50.07,21.59 U4.7
RST: length 26.2
  TOP w0.254: J3.4 6.9,5.87 7.57,6.54 10.97,6.54 12.87,8.44 v1(12.87,12.51) ; U13.1 20.56,15.38 20.56,15.38 20.14,15.38 20.12,15.37 19.57,15.37 17.69,13.48 17.19,13.48 17.19,12.51 v1(17.75,12.51) 17.74,12.5 R9.1 17.14,12.51 C48.2
  BOTTOM w0.254: v1(12.87,12.51) 13.63,12.51 13.63,12.51 v1(17.75,12.51)
RXD: length 47.6
  TOP w0.254: v1(31.5,24.09) 32.01,24.09 32.01,24.09 U10.17 ; v1(32.54,5.98) 32.54,9.81 31.5,10.85 v1(31.5,22.13) ; v1(12.01,8.58) 12.01,10.78 11.6,11.2 U3.26
  BOTTOM w0.254: v1(31.5,22.13) v1(31.5,24.09) ; v1(12.01,8.58) 12.01,7.16 13.2,5.98 v1(32.54,5.98)
RXEN: length 27.7
  TOP w0.254: U13.4 19.43,13.88 18.6,13.04 v1(18.09,13.04) ; U14.4 16.11,31.09 v1(16.11,31.1) 16.11,30.31 16.11,30.31 ; v1(14.81,13.05) 14.81,13.56 14.57,13.81 14.57,26.94 14.81,27.19 v1(14.81,27.7)
  BOTTOM w0.254: v1(18.09,13.04) 17.58,13.04 17.57,13.05 v1(14.81,13.05) ; v1(14.81,27.7) 14.81,30.49 15.42,31.1 v1(16.11,31.1)
SCLK: length 32.9
  TOP w0.254: v1(48.02,16.59) 47.17,16.59 47.17,16.59 U10.49 ; v1(48.02,37.75) 40.64,37.75 40.03,37.15 J5.2
  BOTTOM w0.254: v1(48.02,37.75) v1(48.02,16.59)
SPI_MISO: length 10.5
  TOP w0.254: U13.19 25.96,14.38 25.96,14.38 26.51,14.38 26.59,14.45 v1(27.1,14.45) ; U2.17 26.2,21.48 v1(27.69,21.48)
  BOTTOM w0.254: v1(27.69,21.48) 27.69,15.04 v1(27.1,14.45)
SPI_MOSI: length 13.1
  TOP w0.254: U13.18 25.96,13.88 25.96,13.87 v1(27.84,13.87) ; U2.18 v1(28.35,22.13)
  BOTTOM w0.254: v1(28.35,22.13) 28.35,14.38 v1(27.84,13.87)
SPI_NSS: length 16.3
  TOP w0.254: v1(28.71,22.78) 26.83,22.78 26.83,22.78 U2.19 ; v1(27.74,12.49) 26.48,12.49 26.1,12.88 U13.16
  BOTTOM w0.254: v1(27.74,12.49) 28.29,12.5 29.07,13.27 29.07,22.42 v1(28.71,22.78)
SPI_SCK: length 10.1
  TOP w0.254: U13.17 25.96,13.38 25.96,13.38 26.53,13.38 v1(26.66,13.25) ; U2.16 v1(27.07,20.83)
  BOTTOM w0.254: v1(26.66,13.25) 26.66,13.76 26.54,13.88 26.54,20.29 v1(27.07,20.83)
SWDIO: length 27.1
  TOP w0.254: U10.46 42.97,14.23 42.97,14.24 42.97,15.11 43.45,15.59 v1(47.2,15.59) ; J5.4 v1(47.2,35.35)
  BOTTOM w0.254: v1(47.2,35.35) v1(47.2,15.59)
SWIM: length 22
  TOP w0.254: J3.2 11.98,5.55 12.58,6.16 17.01,6.16 18.13,7.28 18.13,10 18.59,10.45 v1(19.49,10.45) ; U13.28 20.76,15.83 20.16,16.42 v1(19.33,16.42)
  BOTTOM w0.254: v1(19.33,16.42) 19.33,15.86 19.01,15.54 19.01,11.97 19.49,11.49 v1(19.49,10.45)
TXD: length 52.3
  TOP w0.254: U3.25 11.1,10.7 11.48,10.32 11.48,7.87 v1(11.25,7.64) ; U10.16 36.47,25.58 37.02,25.03 37.02,17.36 33.68,14.02 33.68,4.71 v1(32.71,3.74)
  BOTTOM w0.254: v1(11.25,7.64) 11.25,6.83 12.5,5.58 27.92,5.58 29.76,3.74 v1(32.71,3.74)
TXEN: length 26.7
  TOP w0.254: v1(17.76,11.86) 18.27,11.86 19.78,13.38 U13.5 ; v1(14.12,11.86) 14.12,28.5 14.63,29 14.64,29 U14.6
  BOTTOM w0.254: v1(14.12,11.86) 14.88,11.86 14.88,11.86 v1(17.76,11.86)
N58413: length 5.7
  TOP w0.254: C1.2 7.51,17.12 7.5,17.11 C2.2 6.74,15.1 7.15,14.7 U3.6
N58587: length 2.9
  TOP w0.254: U3.11 5.19,10.7 4.49,9.99 4.49,9.58 4.23,9.33 3.84,9.33 R1.2
N58599: length 2.5
  TOP w0.254: U3.9 5.43,11.7 4.71,10.97 4.71,10.96 4.46,10.7 R2.2
N58623: length 6.6
  TOP w0.254: v1(9.66,20.67) 9.66,19.38 9.66,19.37 R3.2 ; J1.2 v1(6.29,20.67)
  BOTTOM w0.254: v1(6.29,20.67) v1(9.66,20.67)
N58627: length 7.4
  TOP w0.254: J1.3 v1(6.91,20.01) ; v1(11.1,20.01) 11.1,19.38 11.09,19.37 R4.2
  BOTTOM w0.254: v1(6.91,20.01) v1(11.1,20.01)
N59257: length 1.5
  TOP w0.5: R13.2 52.08,6.59 D2.2
N59265: length 14.1
  TOP w0.254: D2.1 47.62,8.12 46.94,8.81 v1(46.94,12.75) ; v1(42.23,12.75) 41.97,13.01 41.97,14.23 U10.44
  BOTTOM w0.254: v1(42.23,12.75) v1(46.94,12.75)
N59291: length 5.5
  TOP w0.254: C13.2 40.21,30.48 40.22,30.47 R6.1 40.96,27.3 40.97,27.29 40.97,26.44 U10.7
N59847: length 10
  TOP w0.254: U10.60 46.32,22.08 v1(44.96,22.08) ; R5.1 v1(45.65,29.59)
  BOTTOM w0.254: v1(44.96,22.08) 45.65,22.78 v1(45.65,29.59)
N76001: length 8.7
  TOP w0.3: C3.2 55.69,28.58 56.02,28.25 56.02,23.28 54.98,22.24 U4.1
N76005: length 7.6
  TOP w0.254: v1(52.26,28.58) 52.43,28.58 ; v1(52.26,23.93) 52.35,23.84
  TOP w0.3: 52.43,28.58 C3.1 ; 52.35,23.84 52.67,23.52 U4.3
  BOTTOM w0.254: v1(52.26,28.58) v1(52.26,23.93)
N76017: length 8.4
  TOP w0.3: v1(52.02,23.23) U4.4 ; C4.2 v1(50.92,29.21)
  BOTTOM w0.3: v1(52.02,23.23) 50.92,24.34 v1(50.92,29.21)
N76021: length 8.9
  TOP w0.3: v1(51.21,23.08) 51.37,22.92 U4.5 ; v1(49.24,29.23) 49.24,28.34 C4.1
  BOTTOM w0.3: v1(51.21,23.08) 49.24,25.05 v1(49.24,29.23)
N76033: length 5.2
  TOP w0.254: C5.2 54.89,25.34 54.67,25.11
  TOP w0.3: U4.2 53.32,23.76 54.67,25.11
N76041: length 5.2
  TOP w0.254: U4.6 50.72,22.9 49.31,24.31 C6.2
N76125: length 4.5
  TOP w0.254: R11.2 51.93,15.08 50.07,16.94 U4.10
N78646: length 3.7
  TOP w0.65: L2.1 14.52,29.66 C36.2 15.33,29.66 ; 15.33,29.66 15.33,29.66 16.11,29.66 ; 15.33,29.66 16.1,29.66 U14.5
N78654: length 2.4
  TOP w0.65: C35.1 14.52,35 C37.2 14.52,33.88 L2.2
N78658: length 1.7
  TOP w0.65: J4.1 15.42,36.72 C35.2
N78752: length 4.1
  TOP w0.65: C58.1 17.65,24.39 L11.1 arc(18.01,24.16) 18.44,24.08 20.25,24.08 U2.1
N78904: length 3.1
  TOP w0.65: C30.1 24.23,32.9 arc(24.09,32.5) 23.73,32.28 23.73,32.27 L4.1 22.8,31.08 C29.2
N78924: length 5
  TOP w0.65: L5.1 20.35,33.88 20.35,33.88 C33.2 21.86,33.88 21.87,33.87 L4.2 24.23,33.87 C30.2
N78940: length 3.6
  TOP w0.65: U14.3 17.66,31.12 17.65,31.13 C18.2 17.65,32.95 17.65,32.95 17.65,33.88 L5.2
N78952: length 5.5
  TOP w0.65: C29.1 21.9,29.88 C28.1 ; C28.1 L7.1 ; C28.1 21.9,29.87 L8.2
N79012: length 7.5
  TOP w0.254: U2.25 23.22,26.76 23.79,27.32 26.11,27.32 26.42,27.63 C34.2
  TOP w0.65: C34.2 26.42,29.87 L7.2
N79016: length 1.9
  TOP w0.65: L8.1 21.9,26.1 21.92,26.08 U2.27
N79184: length 8.2
  TOP w0.254: C38.1 17.08,15.62 Y2.1 18.52,16.33 19.32,17.13 19.32,20.58 19.57,20.82 19.62,20.82 19.62,20.83 U2.6
N79188: length 9.5
  TOP w0.254: U2.5 20.25,21.48 19.62,21.48 19.59,21.45 19.55,21.45 18.87,20.76 18.87,17.87 18.54,17.55 17.07,17.55 16.19,18.43 Y2.3 16.19,19.48 16.19,19.49 C39.1
N79232: length 2.5
  TOP w0.254: U2.4 19.69,22.13 18.66,21.1 C40.1
N79316: length 2.2
  TOP w0.254: U2.2 19.46,23.43 19.16,23.13 C42.2
N79364: length 3.9
  TOP w0.65: 17.66,29 17.66,28.15 17.67,28.14 ; L11.2 17.67,26.01 C57.1 17.67,28.14 ; 17.67,28.14 17.66,28.14 U14.1
N758171: length 4
  TOP w0.254: U4.9 49.42,17.21 49.43,17.2 49.43,16.24 50.09,15.58 R12.2

## Copper pours and planes (outline as drawn; the poured copper is in the pictures)
GND on TOP: 64.75,0.25 0.25,0.25 0.25,39.75 64.75,39.75 ; 14 cut-outs
GND on BOTTOM: 64.75,0.25 0.25,0.25 0.25,39.75 64.75,39.75 ; 3 cut-outs

## Text on the board
Ref Des/Silkscreen Top: RST | GND | SWIM | 3.3V | SWCLK | SWDIO
NCLEGEND-1-2: FIGURE | SIZE | 12.0 | 20.0 | 27.953 | 35.433 | 42.913 | 128.346 | 47.244x28.346 | DRILL CHART: TOP to BOTTOM | ALL UNITS ARE IN MILS | PLATED | QTY | 67 | 278 | 2 | 21 | 9
